# EAGLE board guess-the-tune_ (EAGLE 7.6.0)

Size 73.58 x 63.39 mm. Coordinates in mm from the lower left corner, seen from the top.
Outline: 0,0 56.82,0 56.82,53.33 0,53.33 0,0
Copper layers (1*16): Top 0.035mm / dielectric 1.5mm / Bottom 0.035mm
Design rules "default": minimum track width 10mil, minimum drill 24mil, track to track 8mil, track to pad 8mil, pad to pad 8mil, via to via 8mil, smd to smd 8mil, copper to edge 40mil, drill to drill 8mil, minimum pad ring 10mil, minimum via ring 8mil, stop-mask expansion 4mil, vias tented up to drill 0mil, thermal gap 10mil

## Footprints (pad centres in the part's own frame; a part is rotated, then mirrored left to right if it is on the bottom)
1X8P-2.54-2.54-11.6-3.0-BLACK-MALE = drill 0.889 pad 1.651 square: 1 0,8.89 | drill 0.889 pad 1.651: 2 0,6.35; 3 0,3.81; 4 0,1.27; 5 0,-1.27; 6 0,-3.81; 7 0,-6.35; 8 0,-8.89
PIEZO-22MM = drill 1 pad 2.54: P$1 -5,0; P$2 5,0
0207/10 = drill 0.813 octagon: 1 -5.08,0; 2 5.08,0
B25V = drill 0.813 long: A 2.54,0.635; E -2.54,0.635; S 0,0.635
ARDUINO_UNO = drill 1.016 pad 1.88: 0 63.5,50.8; 1 60.96,50.8; 2 58.42,50.8; 3 55.88,50.8; 3.3V 35.56,2.54; 4 53.34,50.8; 5 50.8,50.8; 5V 38.1,2.54; 6 48.26,50.8; 7 45.72,50.8; 8 41.656,50.8; 9 39.116,50.8; 10 36.576,50.8; 11 34.036,50.8; 12 31.496,50.8; 13 28.956,50.8; A0 50.8,2.54; A1 53.34,2.54; A2 55.88,2.54; A3 58.42,2.54; A4 60.96,2.54; A5 63.5,2.54; AREF 23.876,50.8; GND 26.416,50.8; GND. 43.18,2.54; GND.. 40.64,2.54; I/OREF 30.48,2.54; N/C 27.94,2.54; RESET 33.02,2.54; SCL 18.796,50.8; SDA 21.336,50.8; VIN 45.72,2.54 | hole 3.2: 66.04,7.62; 66.04,35.56; 15.24,50.8; 13.97,2.54
1X16P-2.54-2.54-11.6-3.0-BLACK-MALE = drill 0.889 pad 1.651 square: 1 0,19.05 | drill 0.889 pad 1.651: 2 0,16.51; 3 0,13.97; 4 0,11.43; 5 0,8.89; 6 0,6.35; 7 0,3.81; 8 0,1.27; 9 0,-1.27; 10 0,-3.81; 11 0,-6.35; 12 0,-8.89; 13 0,-11.43; 14 0,-13.97; 15 0,-16.51; 16 0,-19.05

## Placement (x,y rotation side)
KEYPADInput  [1X8P-2.54-2.54-11.6-3.0-BLACK-MALE]  5,86.28 0 top  (outside the outline)
PIEZOPiezo Output  [PIEZO-22MM]  5,22.78 0 top
R1  4.7k‎Ω  [0207/10]  5,98.98 0 top  (outside the outline)
R2  4.7k‎Ω  [0207/10]  5,111.68 0 top  (outside the outline)
R3  4.7k‎Ω  [0207/10]  5,124.38 0 top  (outside the outline)
R4  1k‎Ω  [0207/10]  5,137.08 0 top  (outside the outline)
R5  1k‎Ω  [0207/10]  5,149.78 0 top  (outside the outline)
R6  220‎Ω  [0207/10]  5,73.58 0 top  (outside the outline)
R7  1k‎Ω  [0207/10]  5,162.48 0 top  (outside the outline)
R8  1k‎Ω  [0207/10]  5,175.18 0 top  (outside the outline)
R220 Ohm Resistor  220‎Ω  [0207/10]  5,35.48 0 top
RpotPotentiometer-Contrast Control  0k‎Ω  [B25V]  5,48.18 0 top
UArduino Uno R3  [ARDUINO_UNO]  5,10.08 0 top
ULCD Output  [1X16P-2.54-2.54-11.6-3.0-BLACK-MALE]  5,60.88 0 top

## Library data of the parts
KEYPADInput PIEZOPiezo Output R1-R8 R220 Ohm Resistor RpotPotentiometer-Contrast Control UArduino Uno R3 ULCD Output = AUTODESK_CIRCUITS_BREADBOARD

## Nets
N$1: R6.2 R8.1 RpotPotentiometer-Contrast Control.E UArduino Uno R3.GND.. ULCD Output.1 ULCD Output.5 ULCD Output.16
N$2: UArduino Uno R3.12 ULCD Output.4
N$3: UArduino Uno R3.11 ULCD Output.6
N$4: UArduino Uno R3.5 ULCD Output.11
N$5: UArduino Uno R3.4 ULCD Output.12
N$6: UArduino Uno R3.3 ULCD Output.13
N$7: UArduino Uno R3.2 ULCD Output.14
N$8: RpotPotentiometer-Contrast Control.S ULCD Output.3
N$9: R220 Ohm Resistor.2 ULCD Output.15
N$10: PIEZOPiezo Output.P$1 UArduino Uno R3.10
N$11: PIEZOPiezo Output.P$2 R6.1
N$12: KEYPADInput.1 R1.2 R220 Ohm Resistor.1 RpotPotentiometer-Contrast Control.A UArduino Uno R3.5V ULCD Output.2
N$13: KEYPADInput.2 R1.1 R2.2
N$14: KEYPADInput.3 R2.1 R3.2
N$15: KEYPADInput.4 R3.1
N$16: KEYPADInput.5 R4.2 R8.2 UArduino Uno R3.A1
N$17: KEYPADInput.6 R4.1 R5.2
N$18: KEYPADInput.7 R5.1 R7.2
N$19: KEYPADInput.8 R7.1

## Tracks (layer width: path | path; a pad name or v marks a point on that pad's centre or on a via)
N$1  (6 unrouted)
N$2  (1 unrouted)
N$3  (1 unrouted)
N$4  (1 unrouted)
N$5  (1 unrouted)
N$6  (1 unrouted)
N$7  (1 unrouted)
N$8  (1 unrouted)
N$9  (1 unrouted)
N$10  (1 unrouted)
N$11  (1 unrouted)
N$12  (5 unrouted)
N$13  (2 unrouted)
N$14  (2 unrouted)
N$15  (1 unrouted)
N$16  (3 unrouted)
N$17  (2 unrouted)
N$18  (2 unrouted)
N$19  (1 unrouted)